# Altium PCB WIFI.PcbDoc
Units mil, origin at the board's own origin, x right, y up, seen from the top; angles counter-clockwise.
Board outline 6000 x 4000 mil, 2 copper layers (Top Layer, Bottom Layer); 23 components, 30 nets, 95 pads, 20 vias.
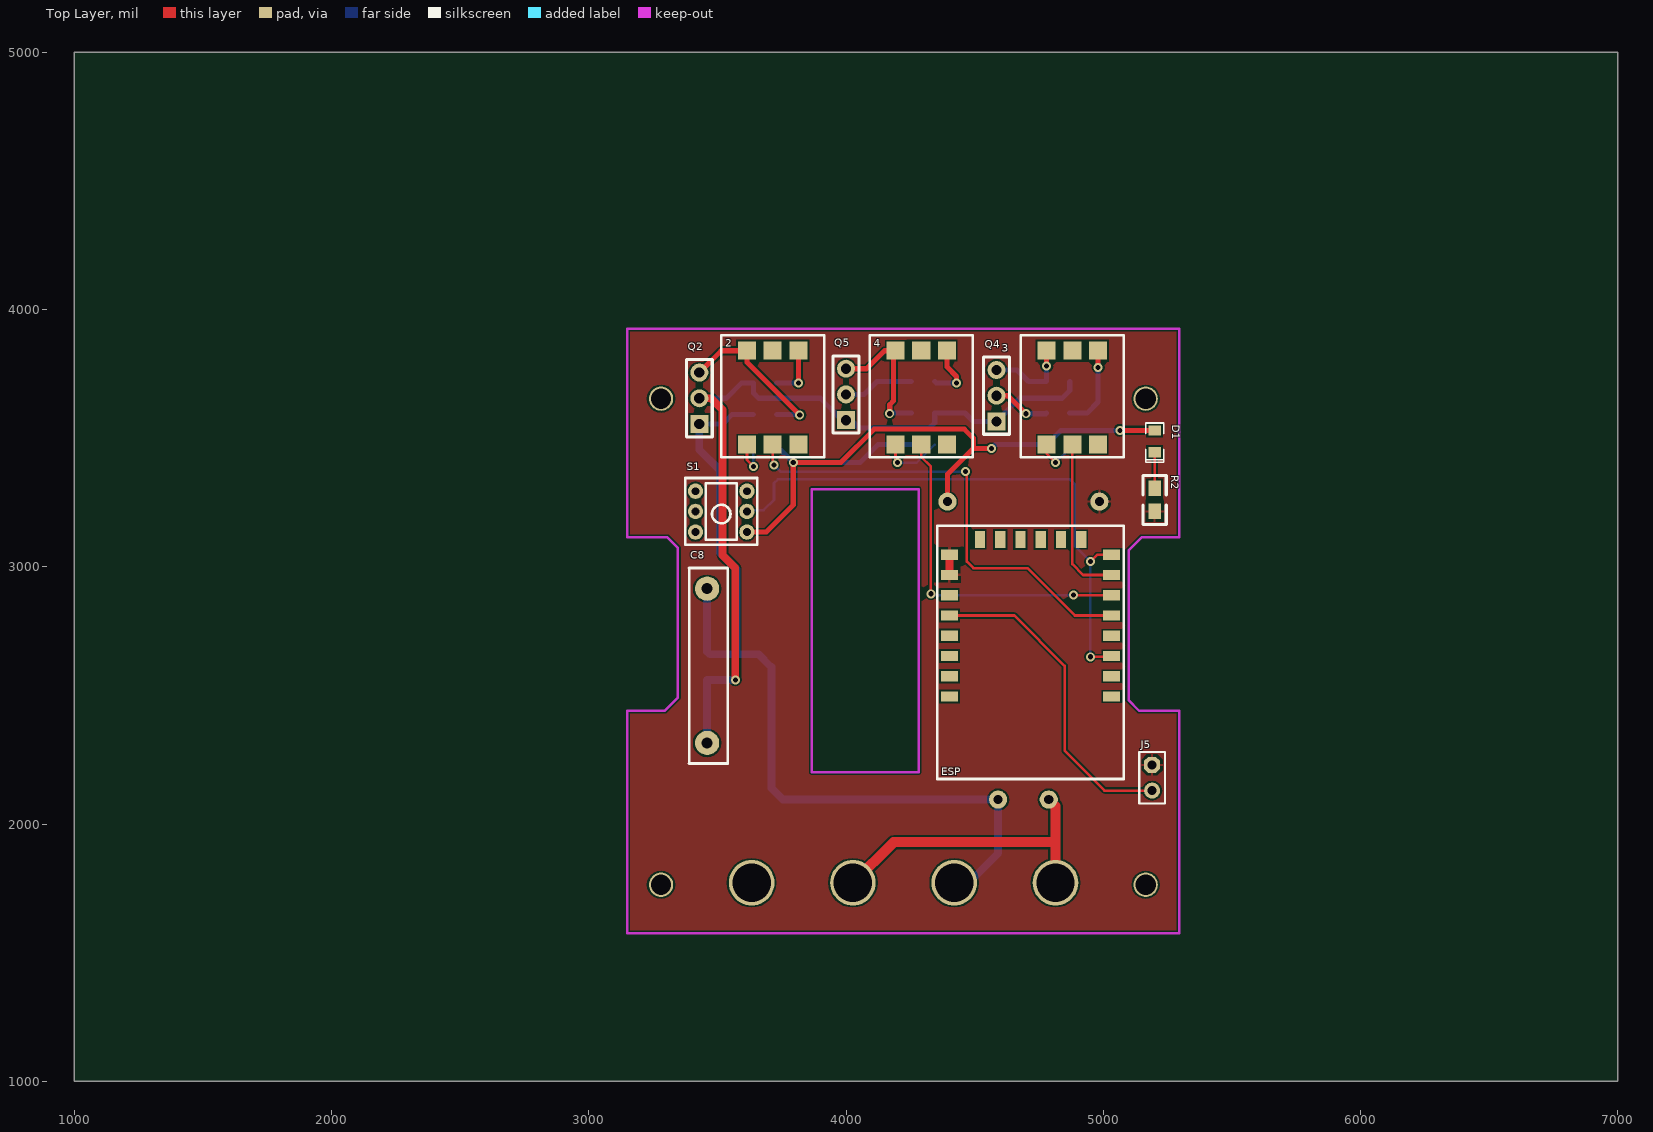
[diagram p0: Top Layer view]
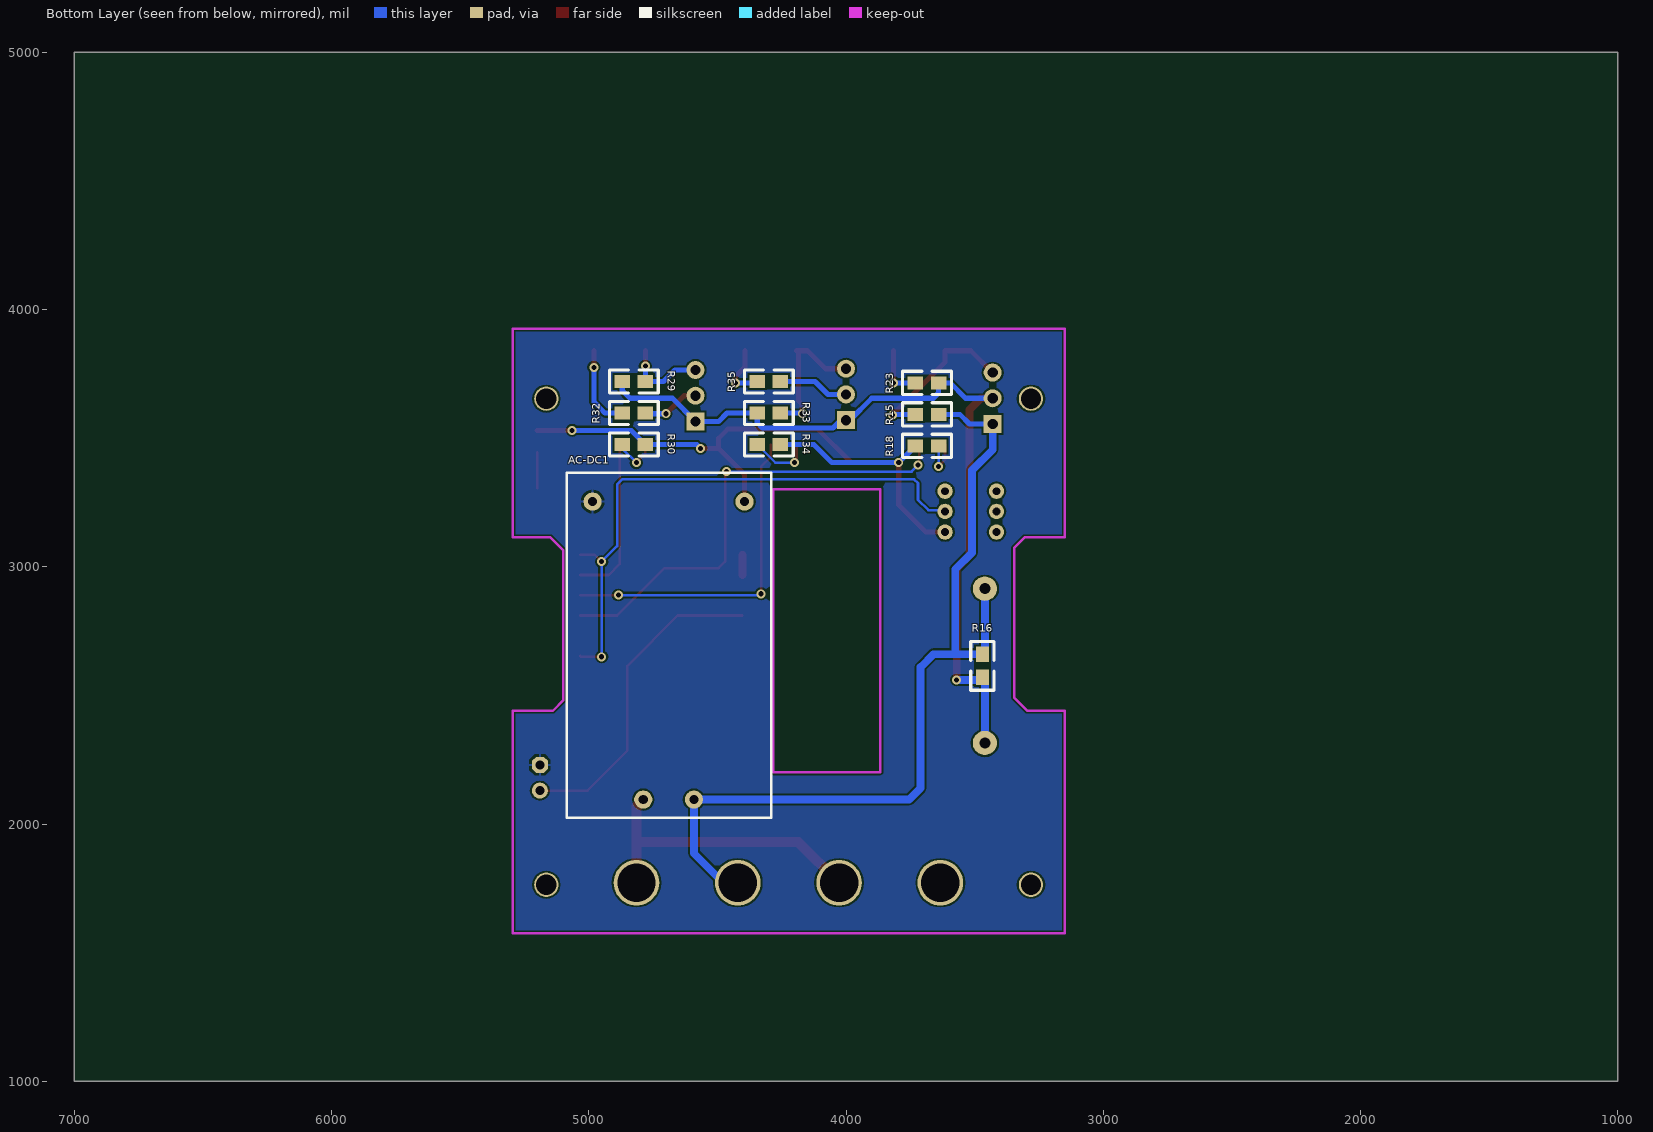
[diagram p1: Bottom Layer view, seen from below]

## Layer stack, top to bottom
Top Solder: solder mask 0.4, Solder Resist, Dk 3.5
Top Layer: signal copper 1.4
Dielectric 1: dielectric 12.6, FR-4, Dk 4.8
Bottom Layer: signal copper 1.4
Bottom Solder: solder mask 0.4, Solder Resist, Dk 3.5

## Board outline
1000,1000 7000,1000 7000,5000 1000,5000

## Design rules (kind name [scope] priority, off if disabled: settings)
Clearance [All] p1: gap=7
MinimumSolderMaskSliver [All] p1: minsoldermaskwidth=4
PolygonConnect [All] p1: connectstyle=Relief reliefconductorwidth=10 reliefentries=4 polygonreliefangle="90 Angle" airgapwidth=10
RoutingVias [All] p1: holewidth=28 width=50 viastyle="Through Hole" minholewidth=10 minwidth=20 maxholewidth=28 maxwidth=50
SilkToSilkClearance [All] p1: silktosilkclearance=4
SilkToSolderMaskClearance [IsPad] p1: minsilkscreentomaskgap=4 clearancetoexposedcopper=TRUE
SolderMaskExpansion [All] p1: expansion=4
Width [All] p1: maxlimit=50 minlimit=10 preferedwidth=10
26 further rules are at their usual default settings.

## Components (designator, comment, footprint, x,y, rotation, side; value= is the part's Value field where it differs from the comment)
2 "MOC3052" MOC3051 3715,3475 r90 top
3 "MOC3052" MOC3051 4880,3475 r90 top
4 "MOC3052" MOC3051 4292.5,3475 r90 top
AC-DC1 "220—5" POWER-220_5 4700,2690 r90 bottom
C8 "Cap" RAD0.5 3460,2615 r90 top
D1 "LED0" LED0805 5200,3530 r270 top
ESP "ESP8266-12E" ESP8266 4875,2535 r180 top (schematic designator ESP1)
J5 "CON2" HDR1X2 5190,2230 r270 top
Q2 "双向可控硅" TO-126 3430,3555 r90 top
Q4 "双向可控硅" TO-126 4585,3565 r90 top
Q5 "双向可控硅" TO-126 4000,3570 r90 top
R2 "Res" 0805 5200,3215 r90 top
R15 "220k" 0805 3640,3592.5 r0 bottom
R16 "Res2" 0805 3470,2570 r90 bottom
R18 "330R" 0805 3640,3470 r0 bottom
R23 "10K" 0805 3640,3715 r0 bottom
R29 "330R" 0805 4870,3720 r180 bottom
R30 "330R" 0805 4870,3475 r180 bottom
R32 "330R" 0805 4780,3597.5 r0 bottom
R33 "330R" 0805 4345,3597.5 r180 bottom
R34 "330R" 0805 4345,3475 r180 bottom
R35 "330R" 0805 4255,3720 r0 bottom
S1 "SW-DPDT" SW-自锁-6P 3695,3495 r180 top

## Footprints (in the part's own frame and the unit in brackets; to place one, negate y for a bottom-side part, rotate by r counter-clockwise, add the part's x,y. Pads: shape width x height; smd on the part's side, far side on the other; paste and mask are expansions set on the pad)
0805 [mil]
  rect 60x50 smd: 1(0,0) 2(90,0)
  silkscreen extent -50,-45 140,45
ESP8266 [mm]
  rect 1.7x1.02 smd: 1(-4,1) 2(-4,-1) 3(-4,-3) 4(-4,-5) 5(-4,-7) 6(-4,-9) 7(-4,-11) 8(-4,-13) 15(12,-13) 16(12,-11) 17(12,-9) 18(12,-7) 19(12,-5) 20(12,-3) 21(12,-1) 22(12,1)
  rect 1.02x1.7 smd: 9(-1,-14.5) 10(1,-14.5) 11(3,-14.5) 12(5,-14.5) 13(7,-14.5) 14(9,-14.5)
  silkscreen extent -5.21,-15.88 13.21,9.14
HDR1X2 [mil]
  oct 62x62 hole 35: 1(0,0)
  round 62 hole 35: 2(100,0)
  silkscreen extent -50,-50 150,50
LED0805 [mil]
  rect 40x50 smd: 1(0,0) 2(85,0)
  silkscreen extent -29,-35 123,35, body extent 3,-24 83,25, height 43
MOC3051 [mm]
  rect 1.78x1.78 smd: 1(0,2.54) 2(0,0) 3(0,-2.54) 4(9.27,-2.54) 5(9.27,0) 6(9.27,2.54)
  silkscreen extent -1.27,-5.08 10.79,5.08
POWER-220_5 [mm]
  round 1.8 hole 0.9: 1(-15.113,-2.762) 2(-15.113,2.238) 3(14.307,-7.762) 4(14.307,7.238)
  silkscreen extent -16.89,-10.41 17.14,9.78
RAD0.5 [mm]
  round 2.4 hole 1.1: 1(-7.62,0) 2(7.62,0)
  silkscreen extent -9.65,-2.03 9.65,1.78
SW-自锁-6P [mil]
  round 60 hole 30: 1(80,360) 2(80,280) 3(80,201.18) 4(280,201.18) 5(280,280) 6(280,360)
  silkscreen extent 40,150 320,410
TO-126 [mil]
  rect 70x70 hole 40: 1(0,0)
  round 70 hole 40: 2(100,0) 3(200,0)
  silkscreen extent -50,-50 250,50

## Part data
2 3 4: library part MOC3041
C8: "Capacitor"
D1: "Typical INFRARED GaAs LED"
ESP: library part ESP8266
J5: "Connector"
R2 R16: "Resistor"
R15 R18 R23 R29 R30 R32 R33 R34 R35: library part RES

## Free pads (board coordinates)
  round 94.49 hole 78.74: 0(3280.87,1763.78) 0(3280.87,3653.54) 0(5165,1763.78) 0(5165,3653.54)
  round 177.17 hole 149.61: 0(3633.31,1771.65) 0(4027.01,1771.65) 0(4420.71,1771.65) 0(4814.41,1771.65)

## Via types
v1: diameter 35, hole 20, Top Layer to Bottom Layer, 20 vias

## Nets (pads, with @x,y where several pads share a name; then routed paths per layer and width w, separated by ;. In a path a pad name is that pad's centre, name@x,y a point inside that pad or via, vN(x,y) a via of type N, cw(c..) or ccw(c..) an arc to the next point about the centre after c; other vN are vias at no path point)
220L: AC-DC1.1 C8.2 pad.0@4420.71,1771.65 Q2.1 R15.1 R16.2 | length 3497.1
  Bottom Layer w20: Q2.1 3520,3555 3557.5,3592.5 R15.1
  Bottom Layer w30: Q2.1 3430,3455 3510,3375 3510,3055 3575,2990 3575,2660 ; C8.2 3460,2670 R16.2 3575,2660 ; pad.0@4420.71,1771.65 4476.65,1771.65 4591.26,1886.26 AC-DC1.1 3755,2095 3710,2140 3710,2610 3660,2660 3575,2660
220N: AC-DC1.2 pad.0@4027.01,1771.65 pad.0@4814.41,1771.65 | length 1187.2
  Top Layer w40: pad.0@4027.01,1771.65 4185,1929.65 4814.06,1929.65 4814.41,1930 ; AC-DC1.2 4814.41,2068.7 4814.41,1930 ; pad.0@4814.41,1771.65 4814.41,1930
220OUT1: Q4.2 R32.1 | length 225
  Top Layer w20: Q4.2 4630,3665 v1(4700,3595)
  Bottom Layer w20: v1(4700,3595) 4777.5,3595 R32.1
220OUT2: Q5.2 R35.1 | length 275.7
  Bottom Layer w20: Q5.2 4070,3670 4120,3720 R35.1
340GR: ESP.22
340GT: ESP.21
ADC: ESP.1
GND: AC-DC1.4 ESP.15 ESP.16 J5.1 R2.1 | length 78.7
  Top Layer w30: ESP.16 ESP.15
IO0: ESP.18 J5.2 | length 1262.7
  Top Layer w10: ESP.18 4654.41,2810.59 4850,2615 4850,2285 5005,2130 J5.2
IO2: ESP.17
IO4: ESP.19
IO5: ESP.20
IO12: 4.2 ESP.6 | length 1300.4
  Top Layer w10: 4.2 4292.5,3427.5 4330,3390 v1(4330,2895) ; v1(4885,2890) 4885.67,2889.33 ESP.6
  Bottom Layer w10: v1(4330,2895) 4335,2890 v1(4885,2890)
IO13: 3.2 ESP.7 | length 634.8
  Top Layer w10: 3.2 4880,3010 4921.93,2968.07 ESP.7
IO14: 2.2 ESP.5 | length 1843.7
  Top Layer w10: 2.2 3715,3400 v1(3720,3395) ; v1@4470,3370 4470,3020 4495,2995 4705,2995 4889.41,2810.59 ESP.5
  Bottom Layer w10: v1(3720,3395) 3745,3370 v1(4465,3370) v1@4470,3375
IO16: ESP.4
Net2_1: 2.1 R18.1 | length 175.4
  Top Layer w10: 2.1 3615,3415 v1(3640,3390)
  Bottom Layer w10: v1(3640,3390) R18.1
Net2_4: 2.4 R23.2 | length 210
  Top Layer w20: v1(3815,3715) 2.4
  Bottom Layer w20: R23.2 v1(3815,3715)
Net2_6: 2.6 Q2.3 R15.2 | length 646.1
  Top Layer w20: Q2.3 3514.96,3839.96 2.6 3615,3795 v1(3820,3590)
  Bottom Layer w20: R15.2 3817.5,3592.5 v1(3820,3590)
Net3_1: 3.1 R30.1 | length 177.3
  Top Layer w10: 3.1 4780,3440 v1(4815,3405)
  Bottom Layer w10: v1(4815,3405) 4870,3460 R30.1
Net3_4: 3.4 R32.2 | length 327.6
  Top Layer w20: v1(4980,3775) 3.4
  Bottom Layer w20: R32.2 4937.5,3597.5 4980,3640 v1(4980,3775)
Net3_6: 3.6 Q4.3 R29.2 | length 333.6
  Top Layer w20: v1(4780,3780) 3.6
  Bottom Layer w20: Q4.3 4665,3765 4710,3720 R29.2 v1(4780,3780)
Net4_1: 4.1 R34.1 | length 247.1
  Top Layer w10: 4.1 4192.5,3412.5 v1(4200,3405)
  Bottom Layer w10: v1(4200,3405) 4275,3405 R34.1
Net4_4: 4.4 R35.2 | length 227.6
  Top Layer w20: 4.4 4392.5,3777.5 4430,3740 v1(4430,3715)
  Bottom Layer w20: R35.2 4350,3715 v1(4430,3715)
Net4_6: 4.6 Q5.3 R33.2 | length 561.8
  Top Layer w20: Q5.3 4080,3770 4149.96,3839.96 4.6 4185,3832.46 4185,3645 4170,3630 v1(4170,3595)
  Bottom Layer w20: v1(4170,3595) 4172.5,3597.5 R33.2
NetC8_1: C8.1 Q2.2 Q4.1 Q5.1 R16.1 R23.1 R29.1 R33.1 | length 3239.1
  Top Layer w30: Q2.2 3475,3655 3520,3610 3520,3045 3570,2995 v1(3570,2560)
  Bottom Layer w20: Q2.2 3535,3655 3595,3715 R23.1 3640,3675 3660,3655 3900,3655 3985,3570 Q5.1 4020,3570 4050,3540 4325,3540 4345,3560 R33.1 4462.5,3597.5 4495,3565 Q4.1 4675,3655 4840,3655 4870,3685 R29.1
  Bottom Layer w30: C8.1 3460,2560 v1(3570,2560)
NetD1_2: D1.2 R2.2 | length 140
  Top Layer w10: R2.2 D1.2
NetESP1_3: ESP.3 ESP.8 S1.2 | length 2245.3
  Top Layer w10: v1(4950,2650) 5029.37,2650 ESP.3 ; v1(4950,3020) 4976.81,3046.81 ESP.8
  Bottom Layer w10: S1.2 3620,3220 3680,3220 3720,3260 3720,3325 3735,3340 4870,3340 4890,3320 4890,3080 v1(4950,3020) v1(4950,2650)
RST: ESP.2
VCC_3.3V: AC-DC1.3 D1.1 R18.2 R30.2 R34.2 S1.1 | length 2738.9
  Top Layer w20: S1.1 3690,3135 3795,3240 v1(3795,3405) 3980,3405 4110,3535 4460,3535 4495,3500 4495,3460 ; AC-DC1.3 4394.41,3359.41 4495,3460 ; v1(4565,3460) 4495,3460 ; v1(5065,3530) D1.1
  Bottom Layer w20: R18.2 v1(3795,3405) 4055,3405 4125,3475 R34.2 ; 4580,3475 R30.2 4835,3530 v1(5065,3530)
pads on no net: 2.3 2.5 3.3 3.5 4.3 4.5 ESP.9 ESP.10 ESP.11 ESP.12 ESP.13 ESP.14 S1.3 S1.4 S1.5 S1.6

## Polygon pours and split planes (outlines as drawn)
GND on Top Layer "Top Layer-No Net" (solid, remove dead copper, pour order 11): 3149.61,3925.2 3149.61,1574.8 5295.28,1574.8 5295.39,1574.92 5295.39,3925.2 3149.61,3925.2
GND on Bottom Layer "Top Layer-No Net" (solid, remove dead copper, pour order 13): 3149.61,3925.2 3149.61,1574.8 5295.28,1574.8 5295.39,1574.92 5295.39,3925.2 3149.61,3925.2

## Keep-outs
Keep-Out Layer:
  lines w10: 4280.39,2202.01 3867.01,2202.01 3867.01,3302.01 4280.39,3302.01 ; 4282.01,2202.01 4282.01,3302.01 ; 5295.28,1574.8 3149.61,1574.8 3149.61,2440 3295,2440 3346.46,2491.46 3346.46,3073.54 3305,3115 3149.61,3115 3149.61,3925.2 5295.39,3925.2 5295.39,3115 5150,3115 5098.54,3063.54 5098.54,2481.46 5140,2440 5295.39,2440 5295.39,1574.92